# Altium PCB SB0037A.PcbDoc (part 4 of 7)
Units mil, origin at the board's own origin, x right, y up, seen from the top; angles counter-clockwise.
Board outline 2872.5 x 4560 mil, 6 copper layers (Top Layer, L2, L3, L4, L5, Bottom Layer), stack 30.268 mil thick; 282 components, 292 nets, 1320 pads, 687 vias.
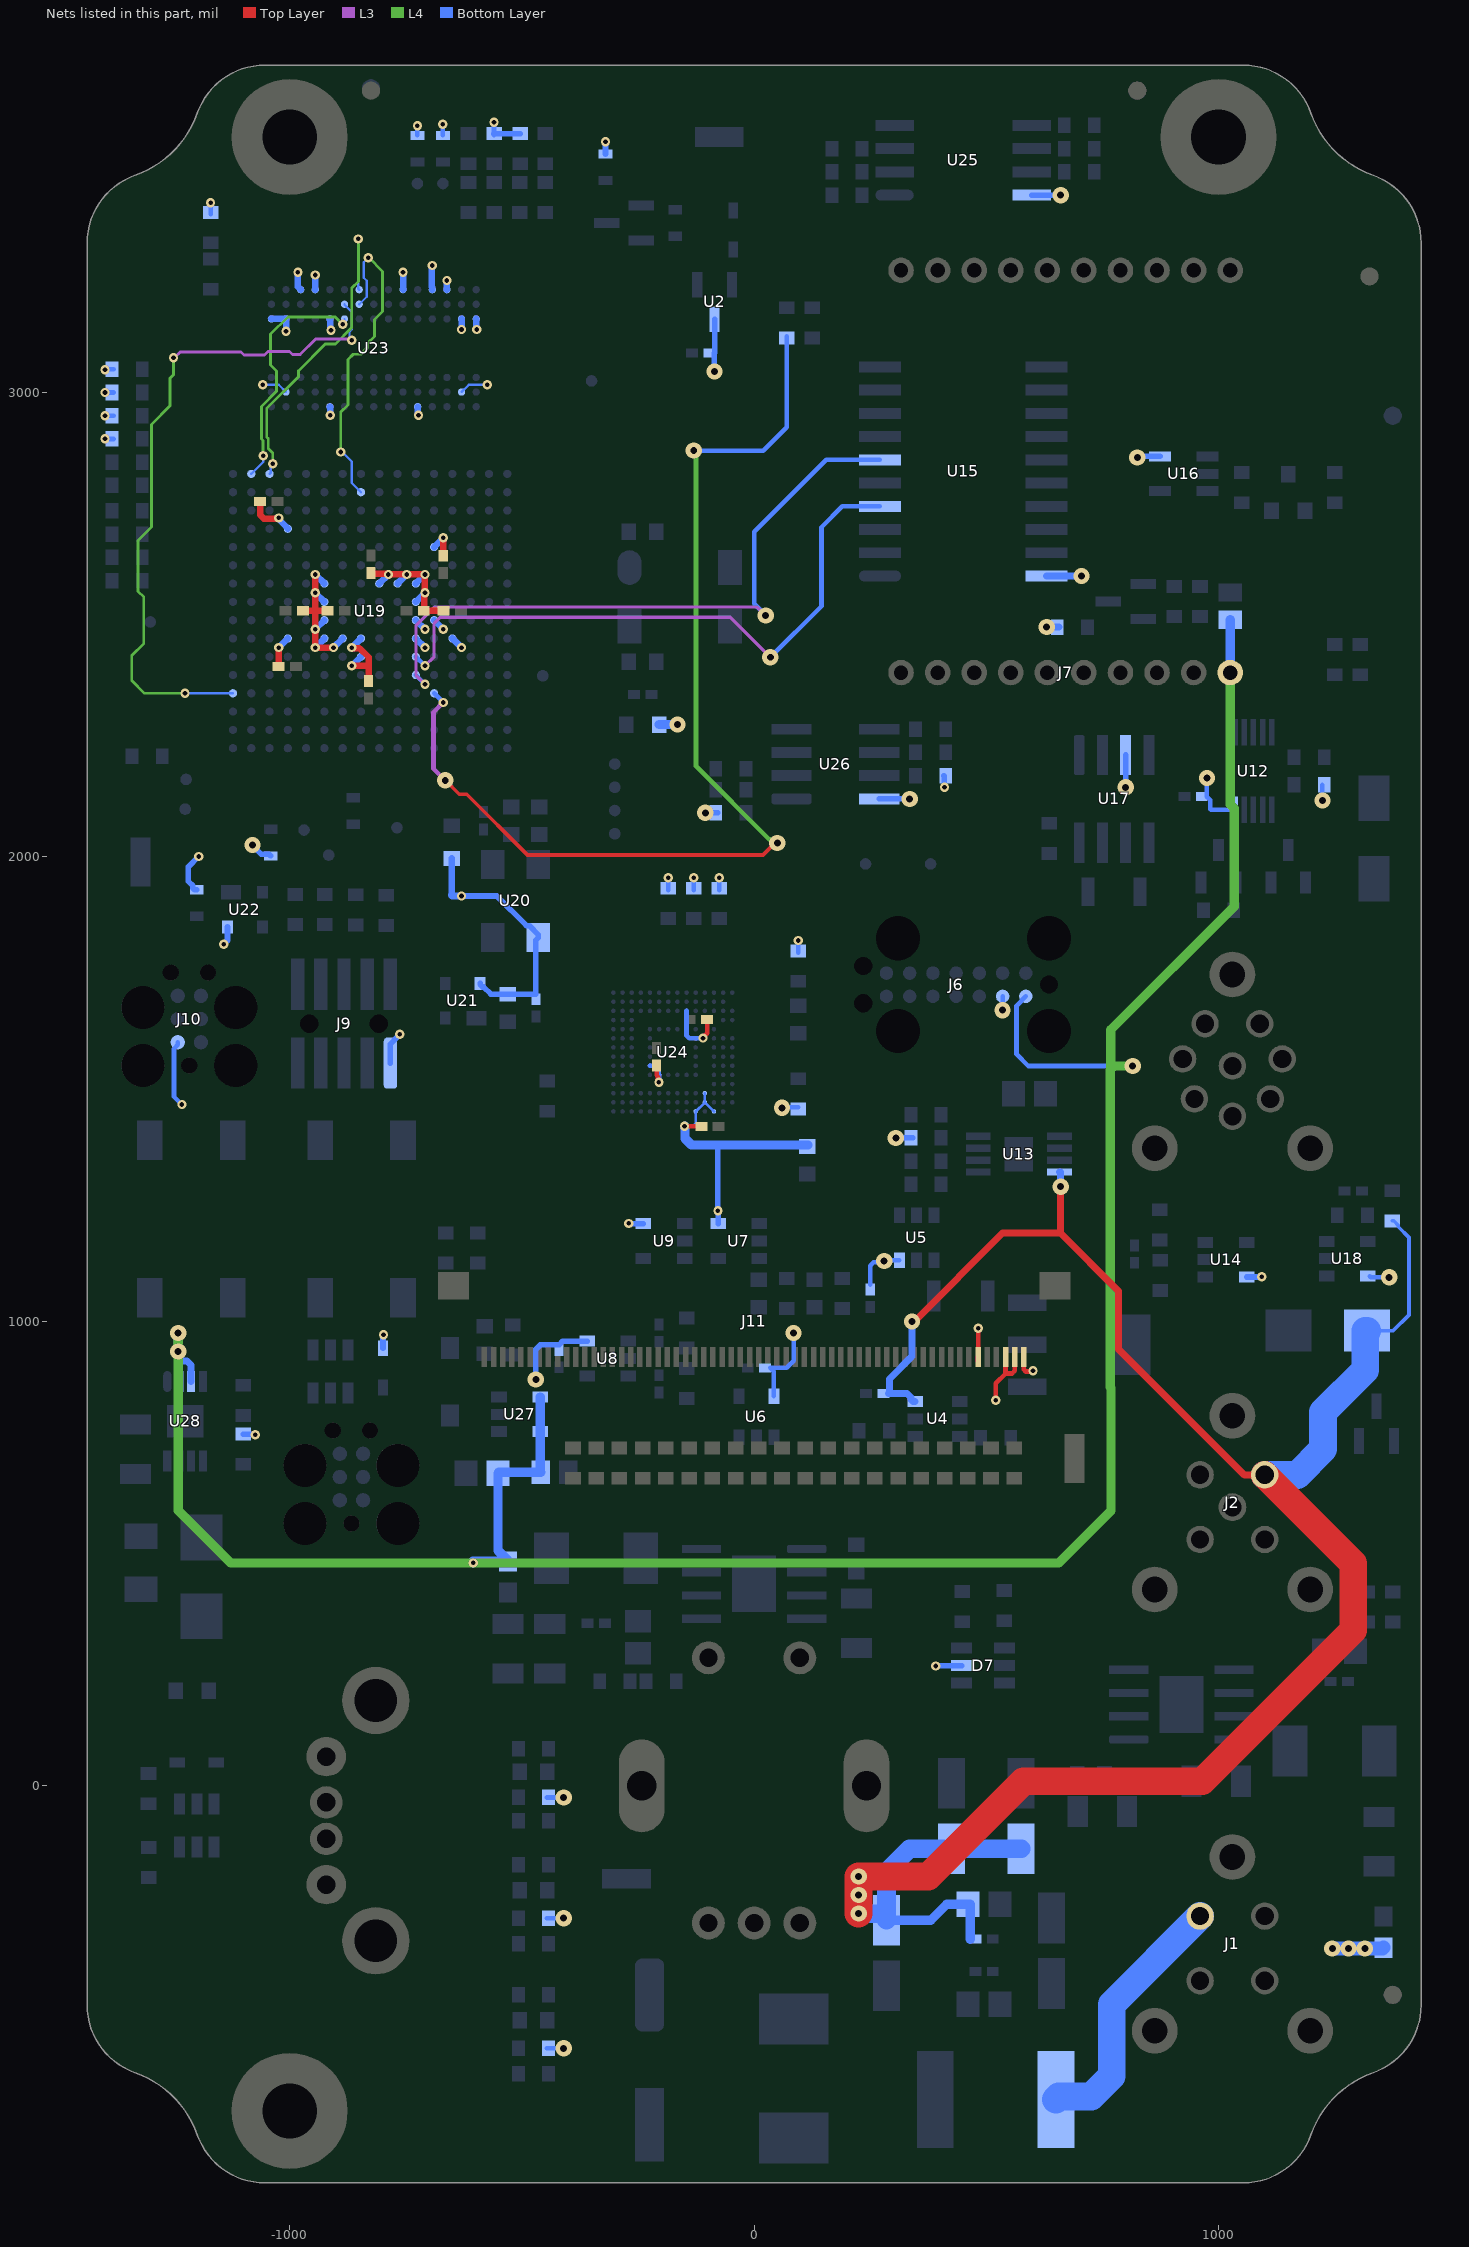
[diagram p6: the nets of this part, all layers, seen from the top]

## Via types
v1: diameter 20, hole 10, Top Layer to Bottom Layer, tented both sides, 484 vias
v2: diameter 35, hole 15, Top Layer to Bottom Layer, tented both sides, 197 vias
v3: diameter 20, hole 10, Top Layer to Bottom Layer, tented top, 6 vias

## Nets (pads, with @x,y where several pads share a name; then routed paths per layer and width w, separated by ;. In a path a pad name is that pad's centre, name@x,y a point inside that pad or via, vN(x,y) a via of type N, cw(c..) or ccw(c..) an arc to the next point about the centre after c; other vN are vias at no path point) (continued)
+3V3: (continued)
  Bottom Layer w12: R46.2@-1200,1929.54 -1204.92,1929.54 -1208.76,1933.39 -1208.76,1938.31 -1218,1947.54 -1218,1979 v1(-1196,2001) ; v1(-1142,1812) -1133.87,1820.13 U22.4@-1133.87,1849.2 ; R118.2@-1100,757.48 -1099.52,757 -1075,757 v1(-1074,756) ; v2(-1080.1,2025.5) -1074.76,2020.17 -1074.76,2019.5 -1061.57,2006.3 -1044.84,2006.3 R45.2@-1041,2002.46 ; D9.1@-799.01,942.13 -799.01,969.99 v1(-798,971) ; J9.1@-783,1556 -783,1597.18 -774.5,1605.68 -774.5,1606.5 v1(-763,1618) ; v1(-630,1916) -554.05,1916 -490.07,1852.02 -484.16,1852.02 -464.57,1832.43 U20.4@-464.57,1826.52 -470,1821.09 -470,1704.54 C39.2@-530,1704.54 -566.86,1704.54 -582.35,1720.02 -584.32,1720.02 -590.13,1725.83 U21.4@-590.13,1727.8 ; R66.2@-560,3557.48 R67.2@-504,3557.48 ; v2(-470,875) -470,940 -460.48,949.52 -420,949.52 -412.12,957.4 U8.5@-359.29,957.4 ; R49.2@-320,3513.54 v1(-320,3540) ; v1(-270,1211) -269.4,1210.4 U9.5@-238.29,1210.4 ; v2(-105,2095) R89.1@-78.54,2095 ; v2@-85,3045 v2(-85.48,3045.48) -85.48,3085 -85,3085.48 U2.3@-85,3157.6 ; -82,1380 -78,1376 v1(-78,1238) -77.29,1237.29 U7.5@-77.29,1210.4 ; U26.8@269.49,2125 325,2125 v2(335,2125) ; v2(305,1395) R15.2@341.46,1395 ; v1(391,258) 389,258 388,259 D7.5@446.74,259 ; R90.2@408.54,2175 409.8,2173.74 409.8,2150.2 v1(410,2150) ; U25.8@597.64,3425 v2(660,3425) ; v2(800,2150) U17.3@800,2219.49 ; v2(825,2860) 827.4,2862.4 U16.5@873.82,2862.4 ; U14.5@1060.29,1095.6 1092.6,1095.6 v1(1093,1096)
  Bottom Layer w14: U23.R7@-1039.37,3158.46 U23.P7@-1007.87,3158.46 v1(-1007.87,3131.89) ; v1(-1023.62,2450.79) U19.N7@-1003.94,2470.47 ; v1(-1023.62,2730) -1022.48,2728.85 -1022.48,2726.24 -1003.94,2707.7 U19.N13@-1003.94,2706.69 ; v1(-982.28,3258.86) -982.28,3227.84 -976.38,3221.93 U23.N9@-976.38,3221.46 ; v1(-944.88,2450.79) U19.L7@-925.2,2470.47 ; v1(-944.88,2490.16) U19.L8@-925.2,2509.84 ; v1(-944.88,2568.9) U19.L9@-925.2,2549.21 ; v1(-944.88,2608.27) U19.L10@-925.2,2588.58 ; U23.M9@-944.88,3221.46 v1(-944.88,3252.95) ; U23.L1@-913.39,2969.49 -913.05,2969.15 -913.05,2951.54 v1(-912.45,2950.93) ; U23.L7@-913.39,3158.46 -913.05,3158.13 -913.05,3137.78 -911.05,3135.79 v1(-911.05,3134.16) ; v1(-905.51,2450.79) U19.K7@-885.83,2470.47 ; v1(-866.14,2411.42) U19.J6@-846.46,2431.1 ; v1(-866.14,2450.79) U19.J7@-846.46,2470.47 ; U19.H10@-807.09,2588.58 v1(-787.4,2608.27) ; U19.G10@-767.72,2588.58 v1(-748.03,2608.27) ; U23.F9@-755.91,3221.46 v1(-755.91,3258.86) ; U19.F7@-728.35,2470.47 v1(-708.66,2450.79) ; U19.F8@-728.35,2509.84 v1(-708.66,2490.16) ; U19.F9@-728.35,2549.21 v1(-708.66,2568.9) ; U19.F10@-728.35,2588.58 v1(-708.66,2608.27) ; U23.E1@-724.41,2969.49 -724.08,2969.15 -724.08,2954.15 -722.48,2952.56 v1(-722.48,2950.93) ; U23.D9@-692.91,3221.46 -693.25,3221.79 -693.25,3226.3 -694.42,3227.47 -694.42,3270.49 -692.91,3272 v1(-692.91,3273.62) ; U19.E8@-688.98,2509.84 v1(-669.29,2490.16) ; U19.E12@-688.98,2667.32 v1(-669.29,2687.01) ; U23.C9@-661.42,3221.46 v1(-661.42,3241.14) ; U19.D7@-649.61,2470.47 v1(-629.92,2450.79) ; v1(-629.92,3135.83) U23.B7@-629.92,3158.46 ; U23.A7@-598.43,3158.46 -598.09,3158.13 -598.09,3136.48 v1(-597.44,3135.83)
  Bottom Layer w15: L8.2@-651,1996.57 -651,1918.93 -652.13,1917.8 -650.32,1916 v1(-630,1916) ; U15.20@629.13,2605 695,2605 v2(705,2605) ; v2(630,2495) R31.2@656.46,2495
  Bottom Layer w20: L7.2@-204.57,2285 v2(-165,2285) ; v1@-149,1420 -149,1394 -135,1380 -82,1380 C52.2@115.79,1380
  Bottom Layer w30: v2(1245,-350) v2(1280,-350) v2(1315,-350) 1353.46,-350 J3.2@1355,-348.46
+5v: C33.2 C57.2 J4.2 J6.1 J7.1 L9.1 U27.4 U27.5 U28.2 U28.3 | length 5642.5
  L4 w20: v2(-1240,975) v2(-1240,935) -1240,593 -1127,480 v1(-605,480) 656,480 768.5,592.5 768.5,857.38 767,858.88 767,1542 775,1550 v2(815,1550) ; 768,1543 768,1628 1033.5,1893.5 1033.5,2104.5 1025,2113 J7.1@1025,2397
  Bottom Layer w10: J6.1@585,1700 565,1680 565,1575 590,1550 v2(815,1550)
  Bottom Layer w15: U28.2@-1237.8,870.63 -1237.8,915 -1220.99,915 -1212.21,906.21 U28.3@-1212.21,870.63
  Bottom Layer w20: v2(-1240,935) v2(-1240,975) ; v1(-605,480) -605,483 -605.46,483.46 J4.2@-530,483.46 -530,485.43 -539.68,495.12 -539.84,495.12 -551.55,506.83 L9.1@-551.55,673 -549.55,675 C57.2@-459.53,675 -460.71,676.18 U27.5@-460.71,762.6 U27.4@-460.71,837.4 ; J7.1@1025,2397 C33.2@1025,2510.47
+12v_Filt: C5.2 C6.2 C19.1 D3.2 J2.1 L1.2 L2.1 L5.1 R41.2 U4.3 U13.8 | length 4885.1
  Top Layer w15: v2(340,1000) 345,1000 535,1190 660,1190 ; v2(660,1290) 660,1190 ; J2.1@1099.4,669.65 1055.35,669.65 785,940 785,1065 660,1190
  Top Layer w60: v2(225,-275) v2(225,-235) v2(225,-195) 375,-195 580,10 965,10 1290,335 1290,479.04 J2.1@1099.4,669.65
  Bottom Layer w8: D3.2@1319.65,980 1319.82,980.17 1376.17,980.17 1410,1014 1410,1180.52 1386.73,1203.79 1386.73,1206.74 1376.95,1216.52 R41.2@1374,1216.52
  Bottom Layer w15: v2(340,1000) 340,925 291.43,876.43 291.43,846.91 289.52,845 328.75,845 337.54,836.21 337.54,831.71 341.85,827.4 U4.3@346.77,827.4 ; U13.8@657.6,1321.61 659.63,1321.61 660,1321.24 v2(660,1290)
  Bottom Layer w20: L1.2@285,-289.53 380.47,-289.53 415,-255 465.47,-255 C6.2@465.47,-329.99
  Bottom Layer w40: v2(225,-195) v2(225,-235) v2(225,-275) 276.06,-275 285,-266.06 L1.2@285,-260 ; L1.2@285,-289.53 L1.2@285,-260 ; L2.1@575,-135.47 L5.1@425,-135.47 334.53,-135.47 285,-185 L1.2@285,-260
  Bottom Layer w60: J2.1@1099.4,669.65 1169.65,669.65 1225,725 1225,805 1315.71,895.71 1315.71,980 D3.2@1319.65,980
\CELL_CTS: R34.1 U19.E4 | length 2349.7
  Top Layer w8: v2@-664.7,2165 -634.7,2135 -618.79,2135 -487.79,2004 19.04,2004 v2@45.04,2030
  Top Layer w10: v2(-665,2165) v2@-664.7,2165 ; v2@45.04,2030 v2(50,2030)
  L3 w10: v1(-669.29,2332.68) -690.29,2311.68 -690.29,2190.29 v2(-665,2165)
  L4 w10: v2(-130,2875) -125.22,2870.22 -125.22,2856.86 -125,2856.64 -125,2195 32.02,2037.98 35.25,2037.98 43.24,2030 v2(50,2030)
  Bottom Layer w10: U19.E4@-688.98,2352.36 v1(-669.29,2332.68) ; v2(-130,2875) 20,2875 70,2925 R34.1@70,3121.46
\CELL_DTR: U15.4 U19.F6 | length 1362.6
  L3 w7: v1(-708.66,2411.42) -689.16,2430.92 -689.16,2502.84 -676,2516 -51,2516 v2(35,2430)
  Bottom Layer w10: U19.F6@-728.35,2431.1 v1(-708.66,2411.42) ; v2(35,2430) 145,2540 145,2710 190,2755 U15.4@270.87,2755
\CELL_RTS: U15.6 U19.F5 | length 1464.6
  L3 w7: v1(-708.66,2372.05) -728.16,2391.55 -728.16,2498.23 -688.39,2538 7,2538 v2(25,2520)
  Bottom Layer w10: U19.F5@-728.35,2391.73 v1(-708.66,2372.05) ; v2(25,2520) 0,2545 0,2700 155,2855 U15.6@270.87,2855
\EMC_CAS: U19.R16 U23.K7 | length 523.6
  L4 w6: v1(-1057.19,2863.65) -1057.19,2896.28 -1060.57,2899.66 -1060.57,2970.13 -1028.07,3002.63 -1028.07,3046.58 -1041,3059.51 -1041,3125.63 -1003.78,3162.85 -901.92,3162.85 v1(-885.87,3146.81)
  Bottom Layer w5: U19.R16@-1082.68,2824.8 -1057.09,2850.39 -1057.09,2863.02 v1@-1054.05,2866.06 ; v1@-887.68,3149.77 -881.89,3155.56 U23.K7@-881.89,3158.46
\EMC_DYCS0: U19.J15 U23.J8 | length 698.7
  L4 w6: v1(-889.76,2872.05) -890.06,2872.35 -890.06,2957.78 -874.36,2973.49 -874.36,3071.01 -863.01,3082.36 -847.09,3082.36 -831.99,3097.45 -831.99,3106.09 -817.48,3120.6 -817.48,3157.09 -799.9,3174.68 -799.9,3260.82 -829.43,3290.35 v1(-830.71,3290.35)
  Bottom Layer w5: v1(-889.76,2872.05) -886.81,2872.05 -866.14,2851.38 -866.14,2805.12 U19.J15@-846.46,2785.43 ; U23.J8@-850.39,3189.96 -834.27,3206.08 -834.27,3240.77 -840.55,3247.05 -840.55,3280.51 v1(-830.71,3290.35)
\EMC_RAS: U19.P16 U23.J9 | length 721.2
  L4 w6: v1(-1036.47,2846.6) -1036.47,2869.79 -1046.19,2879.52 -1046.19,2900.84 -1049.57,2904.21 -1049.57,2965.58 -981.13,3034.02 -981.13,3046.72 -923.49,3104.36 -901.45,3104.36 -866.48,3139.32 -866.48,3224.57 -852.06,3238.99 -852.06,3330.41 v1(-852.36,3330.71)
  Bottom Layer w5: U19.P16@-1043.31,2824.8 -1040.87,2827.24 -1040.87,2838.13 -1035.71,2843.29 -1035.71,2847.35 v1(-1036.47,2846.6) ; v1(-852.36,3330.71) -852.36,3223.43 U23.J9@-850.39,3221.46
\EMC_WE: U19.T4 U23.K8 | length 1462.8
  L3 w6: v1(-1250,3075) -1247.95,3075 -1235.54,3087.41 -1104.54,3087.41 -1098.13,3081 -1054,3081 -1046.78,3088.22 -1000.42,3088.22 -993.74,3081.55 -977.41,3081.55 -943.8,3115.16 -872.78,3115.16 -869.97,3112.36 v1(-866.18,3112.36)
  L4 w6: v1(-1250,3075) -1250,3038.27 -1257.57,3030.7 -1257.57,2971.43 -1297.72,2931.28 -1297.72,2710.22 -1326.5,2681.44 -1326.5,2571.96 -1314,2559.46 -1314,2459.89 -1340,2433.89 -1340,2380 -1312.36,2352.36 v1(-1225.39,2352.36)
  Bottom Layer w5: v1(-1225.39,2352.36) U19.T4@-1122.05,2352.36 ; U23.K8@-881.89,3189.96 -881.89,3188.98 -866.14,3173.23 -866.14,3136.4 -871.06,3131.47 v1@-871.06,3120.23